# Allegro board backup.brd
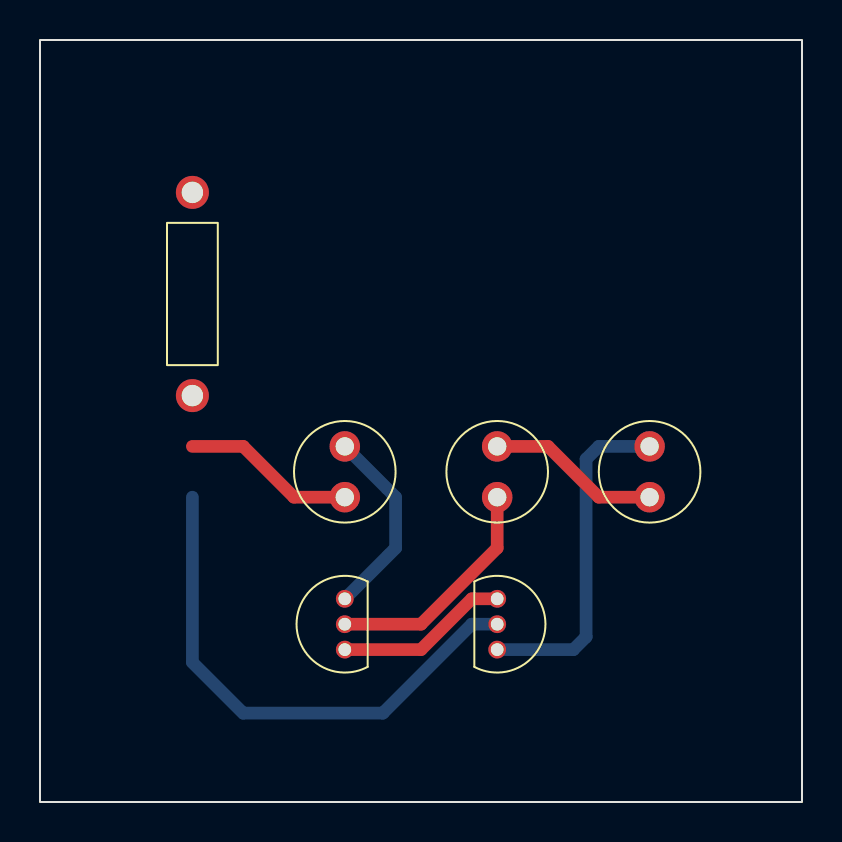
[diagram p0: board, top side]
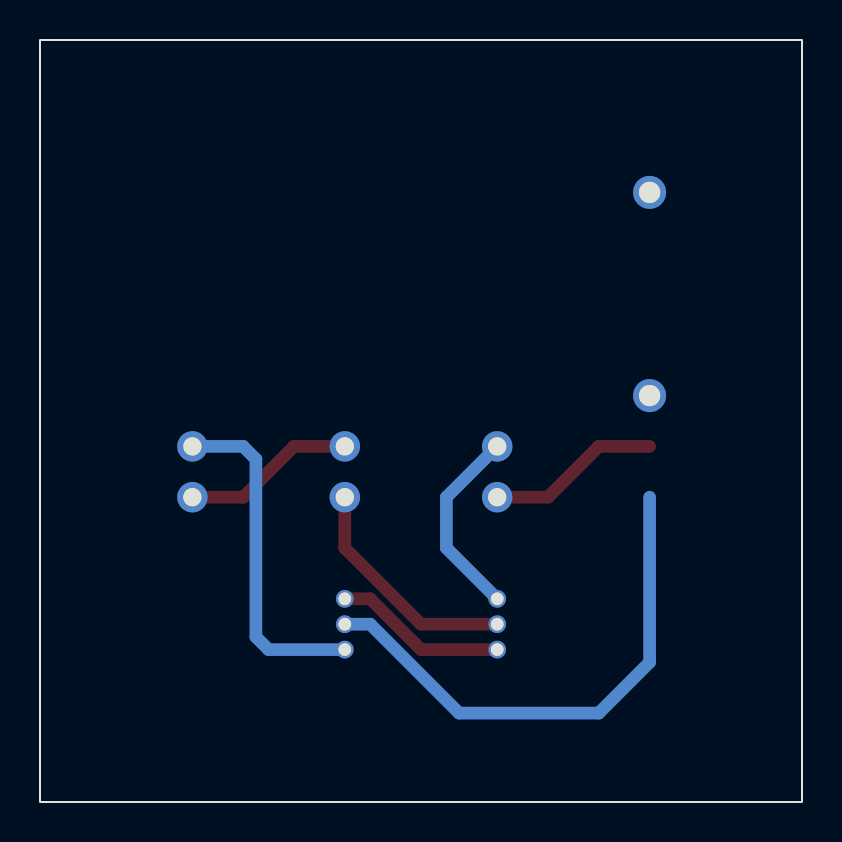
[diagram p1: board, bottom side, seen from below]

Outline 38.1 x 38.1 mm; copper layers: TOP, BOTTOM. Coordinates in mm from the lower left corner of the outline.
Outline path: rectangle 0,0 38.1,38.1

## Placement (name value [footprint] x y rotation side)
C1  CAP POL  [CAP196]  15.24 15.24 0 top
C2  CAP POL  [CAP196]  30.48 15.24 0 top
D2  LED  [CAP196]  22.86 15.24 0 top
Q1  NPN ECB  [TO92]  22.86 10.16 0 top
Q2  NPN ECB  [TO92]  15.24 7.62 180 top
R1  R  [RES400]  7.62 30.48 180 top

## Library data of the parts
C1 C2 = CAP POL: Tolerance: ***; User Part Number: ***
D2 = LED: Tolerance: ***; User Part Number: ***
Q1 Q2 = NPN ECB
R1 = R: Tolerance: ***; User Part Number: ***

## Footprints (pads in the part's own frame, mm; a bottom-side part is the same pattern mirrored in y, then rotated)
CAP196
  round 1.524 hole 0.914: 1(0,0) 2(0,2.54)
RES400
  round 1.651 hole 1.067: 1(0,0) 2(0,10.16)
TO92
  round 0.889 hole 0.635: 1(0,0) 2(0,-1.27) 3(0,-2.54)

## Nets
GND: Q1.1(E) Q2.1(E)
VCC: R1.1
N00290: C2.2 Q1.3(B)
N00297: C2.1 D2.2(ANODE)
N00304: C1.1 R1.2
N00327: D2.1(CATHODE) Q2.2(C)
N00331: Q1.2(C)
N00407: C1.2 Q2.3(B)

## Routing (per net, layer and track width the routed paths; a pad name or vN(x,y) marks a point on that pad's centre or on a via; arc(x,y) is an arc through that point)
GND: length 8.7
  TOP w0.635: Q2.1 19.05,7.62 21.59,10.16 Q1.1
N00290: length 17
  BOTTOM w0.635: Q1.3 26.67,7.62 27.3,8.26 27.3,17.14 27.94,17.78 C2.2
N00297: length 8.7
  TOP w0.635: C2.1 27.94,15.24 25.4,17.78 D2.2
N00304: length 8.7
  TOP w0.635: 7.62,17.78 10.16,17.78 12.7,15.24 C1.1
N00327: length 11.7
  TOP w0.635: D2.1 22.86,12.7 19.05,8.89 Q2.2
N00331: length 26.4
  BOTTOM w0.635: Q1.2 21.59,8.89 17.14,4.45 10.16,4.45 7.62,6.99 7.62,15.24
N00407: length 9.7
  BOTTOM w0.635: Q2.3 17.78,12.7 17.78,15.24 C1.2
